# Allegro board BBear_balance_car.brd
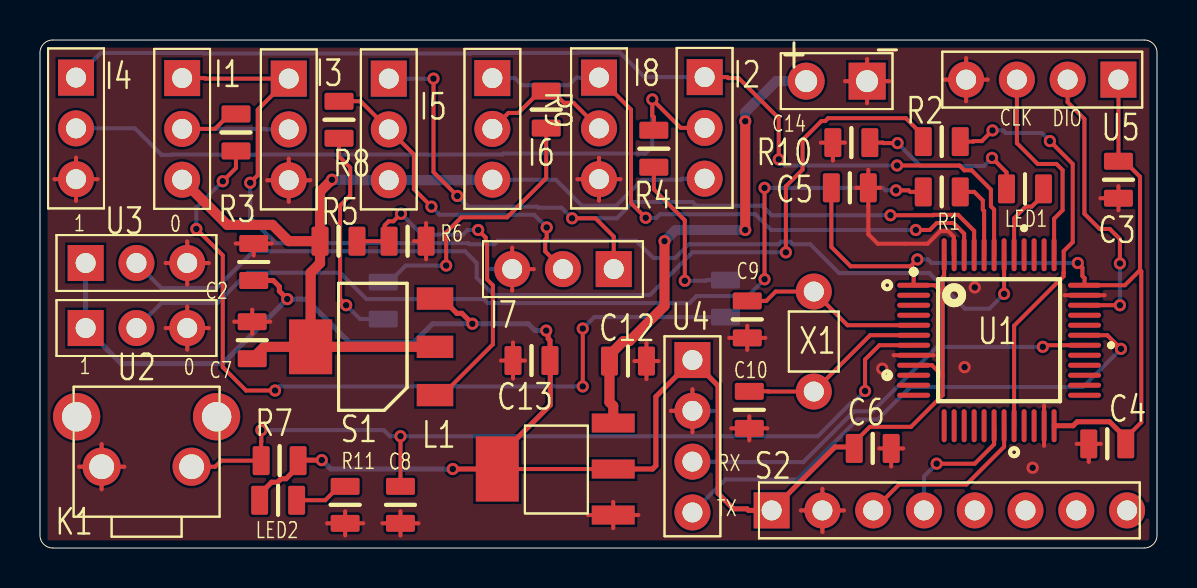
[diagram p0: board, top side]
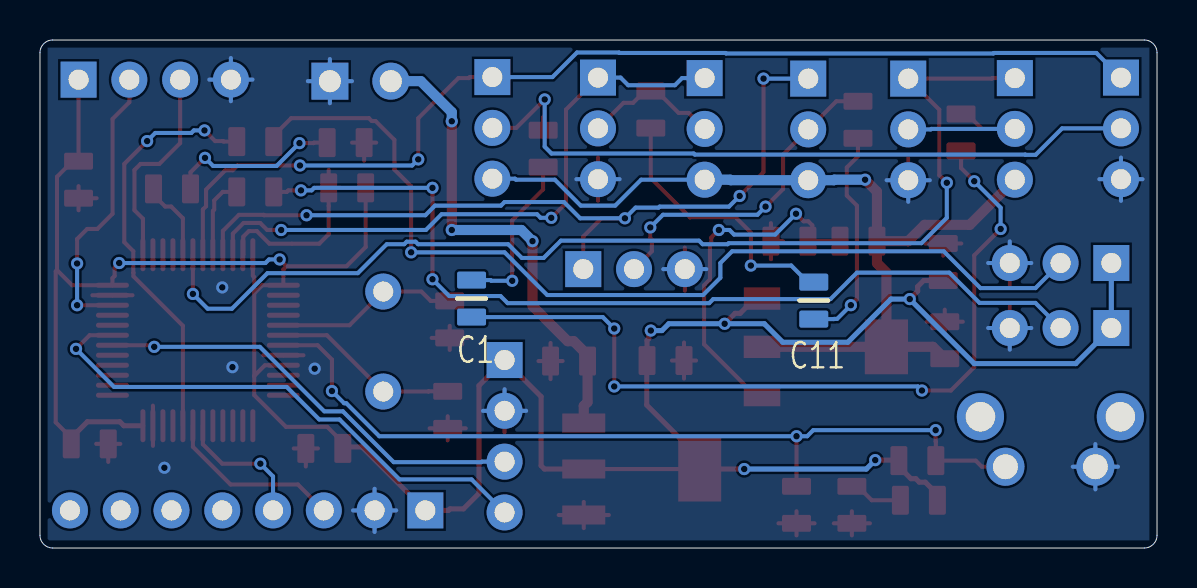
[diagram p1: board, bottom side, seen from below]

Outline 55.88 x 25.4 mm; copper layers: TOP, BOTTOM. Coordinates in mm from the lower left corner of the outline.
Outline path: 0,24.77 arc(0.19,25.21) 0.64,25.4 55.25,25.4 arc(55.69,25.21) 55.88,24.77 55.88,0.63 arc(55.69,0.19) 55.25,0 0.64,0 arc(0.19,0.19) 0,0.63 0,24.77

## Placement (name value [footprint] x y rotation side)
C1  CON2  [C-0805]  34.29 12.47 270 bottom
C2  4.7UF  [C-0805]  10.69 14.3 90 top
C3  0.1UF  [C-0805]  53.95 18.41 90 top
C4  0.1UF  [C-0805]  53.39 5.21 0 top
C5  0.1UF  [C-0805]  40.51 18.01 180 top
C6  0.1UF  [C-0805]  41.66 4.98 180 top
C7  4.7UF  [C-0805]  10.62 10.39 90 top
C8  1UF  [C-0805]  18.03 2.16 90 top
C9  22PF  [C-0805]  35.38 11.43 90 top
C10  22PF  [C-0805]  35.48 6.91 90 top
C11  CON2  [C-0805]  17.17 12.37 270 bottom
C12  0.1UF  [C-0805]  29.41 9.35 0 top
C13  10UF  [C-0805]  24.59 9.37 0 top
C14  POWER  [CON2_R2_54]  41.38 23.34 270 top
I1  IRF4905  [CON3]  7.11 23.49 0 top
I2  IRF4905  [CON3]  33.25 23.55 0 top
I3  IRF3205  [CON3]  12.45 23.47 0 top
I4  IRF3205  [CON3]  1.8 23.52 0 top
I5  IRF4905  [CON3]  17.45 23.47 0 top
I6  IRF4905  [CON3]  22.63 23.49 0 top
I7  IRF3205  [CON3]  28.7 13.94 270 top
I8  IRF3205  [CON3]  27.97 23.52 0 top
K1  KEY-4  [BUTTON_6X6X5]  5.33 4.06 0 top
L1  LM1117  [LM1117_3_3]  28.68 6.25 180 top
LED1  HEARTLED  [C-0805]  49.28 17.96 0 top
LED2  POWER  [C-0805]  11.91 2.39 180 top
R1  10K  [C-0805]  45.11 17.81 0 top
R2  10K  [C-0805]  45.11 20.32 0 top
R3  51R  [C-0805]  9.8 20.78 270 top
R4  51R  [C-0805]  30.71 19.96 270 top
R5  10K  [C-0805]  14.94 15.34 0 top
R6  15K  [C-0805]  18.39 15.34 0 top
R7  10K  [C-0805]  11.99 4.37 180 top
R8  51R  [C-0805]  14.96 21.41 270 top
R9  51R  [C-0805]  25.32 21.92 270 top
R10  1K  [C-0805]  40.59 20.27 180 top
R11  1K  [C-0805]  15.27 2.16 270 top
S1  SPX1117  [SOT223]  16.71 10.06 90 top
S2  MPU6050  [CON8]  36.6 1.88 90 top
U1  STM32F103C8T6  [NCU100_LQFP_48]  47.98 10.39 0 top
U2  BOOT0  [CON3]  2.29 11 90 top
U3  BOOT1  [CON3]  2.29 14.25 90 top
U4  -  [CON4]  32.64 9.4 0 top
U5  SWD  [CON4]  53.95 23.42 270 top
X1  -  [XTAL]  38.71 7.82 90 top

## Library data of the parts
C1 C11 = CON2: Tolerance: RichardLC; User Part Number: pn
C2-C10 C12 C13 = CAP: Tolerance: RichardLC; User Part Number: pn
C14 = CON2
I1 I2 I5 I6 = IRF4905
I3 I4 I7 I8 = IRL3205
K1 = KEY-4
L1 = LM1117
LED1 LED2 = LED: Tolerance: RichardLC; User Part Number: pn
R1-R11 = R: Tolerance: RichardLC; User Part Number: pn
S1 = SPX1117_5
S2 = CON8
U1 = STM32F103C8T6: User Part Number: pn; Tolerance: RichardLC
U2 U3 = CON3
U4 U5 = CON4
X1 = XTAL

## Footprints (pads in the part's own frame, mm; a bottom-side part is the same pattern mirrored in y, then rotated)
BUTTON_6X6X5
  round 1.905 hole 1.245: 1(-2.25,0) 2(2.25,0)
  round 2.362 hole 1.473: 3(-3.5,2.5) 4(3.5,2.5)
C-0805
  custom 0.848x1.448 smd: 1(-0.925,0) 2(0.925,0)
CON2_R2_54
  rect 1.849x1.849 hole 1.1: 1(0,0)
  round 1.849 hole 1.1: 2(0,-3.048)
CON3
  rect 1.8x1.8 hole 1: 1(0,0)
  round 1.8 hole 1: 2(0,-2.54) 3(0,-5.08)
CON4
  rect 1.8x1.8 hole 1: 1(0,0)
  round 1.8 hole 1: 2(0,-2.54) 3(0,-5.08) 4(0,-7.62)
CON8
  rect 1.8x1.8 hole 1: 1(0,0)
  round 1.8 hole 1: 2(0,-2.54) 3(0,-5.08) 4(0,-7.62) 5(0,-10.16) 6(0,-12.7) 7(0,-15.24) 8(0,-17.78)
LM1117_3_3
  rect 2.15x0.95 smd: 1(0,0) 2(0,2.3) 3(0,4.6)
  rect 2.15x3.25 smd: 4(5.8,2.3)
NCU100_LQFP_48
  oval 1.651x0.249 smd: 1(-4.275,2.75) 2(-4.275,2.25) 3(-4.275,1.75) 4(-4.275,1.25) 5(-4.275,0.75) 6(-4.275,0.25) 7(-4.275,-0.25) 8(-4.275,-0.75) 9(-4.275,-1.25) 10(-4.275,-1.75) 11(-4.275,-2.25) 12(-4.275,-2.75) 25(4.275,-2.75) 26(4.275,-2.25) 27(4.275,-1.75) 28(4.275,-1.25) 29(4.275,-0.75) 30(4.275,-0.25) 31(4.275,0.25) 32(4.275,0.75) 33(4.275,1.25) 34(4.275,1.75) 35(4.275,2.25) 36(4.275,2.75)
  oval 0.249x1.651 smd: 13(-2.75,-4.275) 14(-2.25,-4.275) 15(-1.75,-4.275) 16(-1.25,-4.275) 17(-0.75,-4.275) 18(-0.25,-4.275) 19(0.25,-4.275) 20(0.75,-4.275) 21(1.25,-4.275) 22(1.75,-4.275) 23(2.25,-4.275) 24(2.75,-4.275) 37(2.75,4.275) 38(2.25,4.275) 39(1.75,4.275) 40(1.25,4.275) 41(0.75,4.275) 42(0.25,4.275) 43(-0.25,4.275) 44(-0.75,4.275) 45(-1.25,4.275) 46(-1.75,4.275) 47(-2.25,4.275) 48(-2.75,4.275)
SOT223
  rect 1.118x1.829 smd: 1(-2.413,-3.048) 2(0,-3.048) 3(2.413,-3.048)
  rect 2.743x2.159 smd: 4(0,3.175)
XTAL
  round 1.8 hole 1: 1(0,0) 2(5,0)

## Nets
GND: C2.2 C3.1 C4.1 C5.1 C6.1 C7.2 C8.1 C9.1 C10.1 C12.2 C13.1 C14.1(-) I3.3(S) I4.3(S) I7.3(S) I8.3(S) K1.1 L1.3(GND) R6.2 R10.2 R11.2 S2.2 U1.8(VSSA) U1.23(VSS_1) U1.35(VSS_2) U1.47(VSS_3) U2.3 U3.3 U4.2 U5.4
VCC3.3: C2.1 C3.2 C4.2 C5.2 C6.2 C13.2 L1.2(OUT2) L1.4(OUT1) LED2.2 R7.1 S1.3(VIN) S2.1 U1.1(VBAT) U1.9(VDDA) U1.24(VDD_1) U1.36(VDD_2) U1.48(VDD_3) U2.1 U3.1 U4.1 U5.1
BAT_5V: C7.1 I1.3(S) I2.3(S) I5.3(S) I6.3(S) R5.1 S1.2(VOUT) S1.4(VO)
BOOT0: R1.2 U1.44(BOOT0)
BOOT1: R2.2 U1.20(PB2/BOOT1)
HEART_LED: LED1.2 U1.41(PB5)
LEFT_BACK: I2.1(G) I4.1(G) U1.43(PB7)
LEFT_FOR: I1.1(G) I3.1(G) U1.42(PB6)
ML+: C1.2(+) R3.2
ML-: C1.1(-) R4.2
MR+: C11.2(+) R8.2
MR-: C11.1(-) R9.2
OSCIN: C9.2 U1.5(OSCIN) X1.2
OSCOUT: C10.2 U1.6(OSCOUT) X1.1
PA9: U1.31(PA10) U4.4
PA10: U1.30(PA9) U4.3
RESET: C8.2 K1.2 R7.2 U1.7(NRST)
RIGHT_BACK: I6.1(G) I8.1(G) U1.46(PB9)
RIGHT_FOR: I5.1(G) I7.1(G) U1.45(PB8)
SCL: S2.3 U1.19(PB1)
SDA: S2.4 U1.18(PB0)
SWCLK: U1.37(SWCLK) U5.3
SWIO: U1.34(SWIO) U5.2
N00802: C12.1 C14.2(+) L1.1(VCC-IN)
N03806: LED2.1 R11.1
N05288: I1.2(D) I3.2(D) R3.1
N05461: I2.2(D) I4.2(D) R4.1
N06847: I5.2(D) I7.2(D) R8.1
N06871: I6.2(D) I8.2(D) R9.1
N07785: LED1.1 R10.1
N16026: R5.2 R6.1 S1.1(ADJ)
N073361: R1.1 U2.2
N073541: R2.1 U3.2

Pads without a net: K1 3 4; S2 5 6 7 8; U1 2 3 4 10 11 12 13 14 15 16 17 21 22 25 26 27 28 29 32 33 38 39 40

## Via types
v1: diameter 0.61, hole 0.33, TOP to BOTTOM, 54 vias

## Routing (per net, layer and track width the routed paths; a pad name or vN(x,y) marks a point on that pad's centre or on a via; arc(x,y) is an arc through that point)
GND: length 139.1
  TOP w0.203: 23.66,8.47 C13.1 ; C13.1 23.66,10.27 ; C13.1 24.26,9.37 ; C13.1 23.06,9.37 ; 39.06,20.27 R10.2 ; R10.2 40.27,20.27 ; R10.2 39.66,19.37 ; 12.45,17.31 I3.3 ; I3.3 11.37,18.39 ; I3.3 13.52,18.39 ; I3.3 12.45,19.47 ; C12.2 30.34,10.25 ; C12.2 29.74,9.35 ; C12.2 30.34,8.44 ; C12.2 30.94,9.35 ; U2.3 7.37,12.08 ; U2.3 8.44,11 ; U2.3 7.37,9.92 ; U2.3 6.29,11 ; C14.1 41.38,24.45 ; C14.1 41.38,22.24 ; C14.1 42.48,23.34 ; C14.1 40.27,23.34 ; 50.23,5.11 U1.23 50.23,7.12 ; C8.1 18.03,1.84 ; C8.1 17.13,1.23 ; C8.1 18.94,1.23 ; C8.1 18.03,0.63 ; C5.1 41.44,15.69 41.91,15.21 44.4,15.21 45.03,15.84 45.43,15.84 45.71,15.56 45.71,14.68 U1.47 ; C5.1 42.04,18.01 ; C5.1 40.84,18.01 ; C5.1 41.44,18.91 ; C2.2 11.6,15.23 ; C2.2 9.79,15.23 ; C2.2 10.69,14.62 ; C10.1 35.48,6.59 ; C10.1 34.58,5.98 ; C10.1 36.39,5.98 ; C10.1 35.48,5.38 ; 1.8,17.36 I4.3 ; I4.3 2.88,18.44 ; I4.3 1.8,19.52 ; I4.3 0.72,18.44 ; 39.14,0.8 S2.2 ; S2.2 38.06,1.88 ; S2.2 40.22,1.88 ; S2.2 39.14,2.96 ; 18.71,15.34 R6.2 ; R6.2 19.31,14.44 ; R6.2 19.31,16.24 ; U3.3 7.37,15.33 ; U3.3 6.29,14.25 ; U3.3 7.37,13.17 ; U3.3 8.44,14.25 ; 1.95,4.06 K1.1 ; K1.1 3.08,5.19 ; K1.1 4.21,4.06 ; K1.1 3.08,2.93 ; 14.36,1.23 R11.2 ; R11.2 15.27,0.63 ; R11.2 15.27,1.84 ; R11.2 16.17,1.23 ; 45.25,23.42 U5.4 ; U5.4 46.33,24.5 ; U5.4 47.41,23.42 ; U5.4 46.33,22.34 ; C3.1 53.95,18.09 ; C3.1 53.05,17.49 ; C3.1 53.95,16.89 ; 53.26,12.64 U1.35 51.25,12.64 ; 26.89,18.44 I8.3 ; I8.3 27.97,17.36 ; I8.3 27.97,19.52 ; I8.3 29.04,18.44 ; 32.64,5.78 U4.2 ; U4.2 31.56,6.86 ; U4.2 32.64,7.94 ; 42.58,4.08 C6.1 ; C6.1 41.98,4.98 ; C6.1 43.18,4.98 ; 27.42,1.65 L1.3 ; L1.3 28.68,2.3 ; L1.3 28.68,1 ; L1.3 29.93,1.65 ; C7.2 11.52,11.31 ; C7.2 10.62,11.92 ; C7.2 9.71,11.31 ; C7.2 10.62,10.71 ; I7.3 23.62,15.02 ; I7.3 23.62,12.87 ; I7.3 24.7,13.94 ; 51.86,5.21 C4.1 ; C4.1 52.47,4.3 ; C4.1 53.07,5.21 ; C9.1 36.28,10.5 ; C9.1 35.38,9.9 ; C9.1 35.38,11.11 ; C9.1 34.48,10.5 ; 44.71,9.64 U1.8 42.7,9.64
  BOTTOM w0.203: 46.33,22.34 U5.4 ; U5.4 46.33,24.5 ; U5.4 47.41,23.42 ; U5.4 45.25,23.42 ; 1.8,17.36 I4.3 ; I4.3 0.72,18.44 ; I4.3 1.8,19.52 ; I4.3 2.88,18.44 ; 38.06,1.88 S2.2 ; S2.2 39.14,0.8 ; S2.2 40.22,1.88 ; S2.2 39.14,2.96 ; U4.2 32.64,7.94 ; U4.2 31.56,6.86 ; U4.2 33.72,6.86 ; 6.29,14.25 U3.3 ; U3.3 7.37,15.33 ; U3.3 8.44,14.25 ; K1.1 3.08,5.19 ; K1.1 4.21,4.06 ; K1.1 1.95,4.06 ; K1.1 3.08,2.93 ; I3.3 13.52,18.39 ; I3.3 11.37,18.39 ; I3.3 12.45,17.31 ; 24.7,13.94 I7.3 22.54,13.94 ; 29.04,18.44 I8.3 26.89,18.44 ; C14.1 42.48,23.34 ; C14.1 41.38,24.45 ; C14.1 40.27,23.34 ; C14.1 41.38,22.24 ; 7.37,9.92 U2.3 ; U2.3 8.44,11 ; U2.3 6.29,11
  vias: v1(42.14,8.97) v1(46.25,9.04) v1(46.76,13.03) v1(49.66,4.01)
VCC3.3: length 146
  TOP w0.203: 54.32,5.51 55.09,6.28 55.09,13.83 55.03,13.89 ; 45.16,12.74 45.16,13.54 45.23,13.61 U1.48 ; 45.16,12.74 44.76,13.14 U1.1 43.71,13.93 43.55,14.08 ; 45.16,12.74 45.16,8.6 ; 43.55,14.08 v1(43.89,14.43) ; 43.55,14.08 40.55,14.08 39.59,15.05 C5.2 ; U1.9 44.63,9.14 45.16,8.6 ; C6.2 40.73,5.28 41.51,6.06 43.57,6.06 45.16,7.65 45.16,8.6 ; 55.03,13.89 54.27,13.14 U1.36 52.26,13.49 52.15,13.6 52.15,14.02 v1(51.92,14.25) ; 55.03,13.89 55.03,18.56 54.25,19.34 C3.2 U5.1 ; U1.24 50.74,6.11 ; L1.4 L1.2
  TOP w0.254: C2.1 11.67,13.38 11.97,13.07 11.97,12.84 v1(12.37,12.45) ; C6.2 40.65,5.05 39.78,5.05 S2.1 35.45,1.88 35.37,1.96 34.7,1.96 33.92,2.73 33.92,8.12 U4.1 30.81,7.57 30.81,4.11 30.64,3.95 L1.2 ; S1.3 20.12,12.47 20.86,11.73 21.11,11.73 v1(21.63,11.21) ; v1(25.32,10.87) 25.43,10.77 25.43,10.46 25.51,10.38 C13.2 25.53,9.36 25.53,7.15 22.88,4.5 L1.4 v1(20.65,3.95) ; v1(14.1,4.39) 12.94,4.39 R7.1 12.91,4.07 12.31,3.47 12.07,3.47 11.89,3.29 11.59,3.29 10.99,2.69 LED2.2 ; C4.2 54.32,5.51 53.51,6.31 51.88,6.31 51.69,6.11 50.74,6.11
  BOTTOM w0.203: v1(43.89,14.43) 44.42,14.43 44.6,14.25 v1(51.92,14.25)
  BOTTOM w0.254: v1(14.1,4.39) 14.54,3.95 v1(20.65,3.95) ; U3.1 U2.1 4.06,9.22 9.14,9.22 v1(12.37,12.45) 13.31,12.45 15.47,10.29 18.72,10.29 19.64,11.21 v1(21.63,11.21) 24.42,11.21 24.77,10.87 v1(25.32,10.87)
BAT_5V: length 46.1
  TOP w0.508: R5.1 12.44,15.34 11.63,16.16 9.37,16.16 I1.3 ; R5.1 14.01,17.82 v1(14.61,18.41) ; R5.1 14.01,14.24 13.54,13.76 S1.4 ; S1.4 11.21,10.06 C7.1 ; S1.4 S1.2
  BOTTOM w0.203: I2.3 32.12,18.47 32.07,18.41 30.12,18.41 28.83,17.12 27.1,17.12 25.81,18.41 I6.3
  BOTTOM w0.508: v1(14.61,18.41) 16.14,18.41 16.17,18.39 I5.3 21.32,18.39 21.35,18.41 I6.3
BOOT0: length 4
  TOP w0.203: R1.2 46.74,17.81 47.16,17.38 47.16,16.92 47.23,16.85 U1.44
BOOT1: length 20.9
  TOP w0.203: v1(47.65,20.88) 47.12,20.35 46.71,20.35 46.69,20.32 R2.2 ; U1.20 48.73,11.11 51.21,13.59 51.21,13.76 51.21,13.76 51.21,14.84 51.66,15.29 51.66,19.2 v1(50.52,20.35)
  BOTTOM w0.203: v1(47.65,20.88) 48.18,20.88 48.31,20.75 50.11,20.75 v1(50.52,20.35)
HEART_LED: length 4.1
  TOP w0.203: LED1.2 50.2,17.66 49.62,17.07 49.32,17.07 48.73,16.49 U1.41
LEFT_BACK: length 53.7
  TOP w0.203: I2.1 34.38,23.55 34.43,23.49 34.95,23.49 36.96,21.49 v1(36.96,19.43) ; U1.43 47.73,16.93 47.57,17.09 47.57,17.92 46.61,18.88 46.24,18.88 46,19.13 v1(42.88,19.13)
  BOTTOM w0.203: I2.1 30.24,23.55 29.01,24.78 26.92,24.78 26.89,24.75 21.58,24.75 21.56,24.73 8.18,24.73 8.16,24.75 3.03,24.75 I4.1 ; v1(42.88,19.13) 37.26,19.13 v1(36.96,19.43)
LEFT_FOR: length 55.8
  TOP w0.203: v1(10.52,18.26) 10.89,18.64 10.89,21.92 I3.1 8.27,23.47 8.24,23.49 I1.1 ; U1.42 v1(48.23,12.7)
  BOTTOM w0.203: v1(48.23,12.7) 47.49,11.96 46.28,11.96 44.5,13.74 39.98,13.74 38.53,15.19 37.66,15.19 37.53,15.32 37.09,15.32 36.96,15.19 32.46,15.19 31.78,14.5 30.68,14.5 29.82,15.37 22.91,15.37 22.73,15.19 21.48,15.19 21.43,15.24 11.79,15.24 10.52,16.51 v1(10.52,18.26)
ML+: length 41
  TOP w0.203: v1(27.15,10.97) v1(27.15,8.08) ; v1(11.76,7.87) 10.31,7.87 9.14,9.04 9.14,14.63 v1(7.82,15.95) ; R3.2 9.8,19 v1(9.14,18.34)
  BOTTOM w0.203: v1(27.15,8.08) 11.96,8.08 v1(11.76,7.87) ; v1(9.14,18.34) 7.82,17.02 v1(7.82,15.95) ; v1(27.15,10.97) 27.73,11.55 C1.2
ML-: length 8.4
  TOP w0.203: v1(32.26,13.36) 32.26,16.38 30.71,17.93 R4.2
  BOTTOM w0.203: C1.1 33.34,13.4 33.3,13.36 v1(32.26,13.36)
MR+: length 11.1
  TOP w0.203: R8.2 14.96,19.58 15.52,19.02 15.52,17.63 15.01,17.12 15.01,12.45 v1(15.32,12.14)
  BOTTOM w0.203: v1(15.32,12.14) 16,11.46 16.15,11.46 16.17,11.44 C11.2
MR-: length 13.8
  TOP w0.203: v1(20.32,14.12) 20.32,15.77 21.08,16.54 23.37,16.54 25.32,18.49 R9.2
  BOTTOM w0.203: v1(20.32,14.12) 18.3,14.12 17.47,13.29 C11.1
OSCIN: length 9.2
  TOP w0.203: U1.5 40.39,11.14 X1.2 36.8,12.82 36.33,12.36 C9.2
OSCOUT: length 9.4
  TOP w0.203: C10.2 36.44,7.83 36.45,7.82 X1.1 41.52,10.64 U1.6
PA9: length 26.9
  TOP w0.203: U1.31 53.39,10.64 v1(54.08,9.96)
  BOTTOM w0.203: U4.4 34.29,3.43 37.9,3.43 40.89,6.43 41.91,6.43 43.54,8.05 52.17,8.05 v1(54.08,9.96)
PA10: length 22
  TOP w0.203: U1.30 50.25,10.14 v1(50.17,10.06)
  BOTTOM w0.203: U4.3 33.77,4.32 33.79,4.29 38.19,4.29 40.73,6.83 41.66,6.83 44.88,10.06 v1(50.17,10.06)
RESET: length 43.2
  TOP w0.203: v1(18.03,5.59) C8.2 ; v1(11.07,5.89) 11.07,5.33 11.06,5.32 R7.2 9.07,4.37 8.77,4.06 K1.2 ; v1(41.28,7.85) 41.28,9.42 41.99,10.14 U1.7
  BOTTOM w0.203: v1(11.07,5.89) 17.2,5.89 17.5,5.59 v1(18.03,5.59) 38.91,5.59 40.56,7.24 40.67,7.24 v1(41.28,7.85)
RIGHT_BACK: length 31.4
  TOP w0.203: v1(43.81,15.9) 44.51,15.9 44.86,16.25 45.7,16.25 46.23,15.72 U1.46 ; v1(30.3,16.51) 29.57,17.25 29.57,21.92 I8.1
  BOTTOM w0.203: v1(30.3,16.51) 30.84,16.51 31.01,16.69 35.79,16.69 36.58,15.9 v1(43.81,15.9) ; I8.1 26.84,23.52 26.46,23.14 24.12,23.14 23.76,23.49 I6.1
RIGHT_FOR: length 41.1
  TOP w0.203: v1(26.62,16.48) 27.79,16.48 28.7,15.57 I7.1 ; v1(19.69,23.47) 19.69,18.8 v1(20.88,17.6) ; U1.45 46.73,15.85 45.93,16.66 44.69,16.66 44.67,16.64 v1(42.55,16.64)
  BOTTOM w0.203: v1(42.55,16.64) 36.6,16.64 36.12,17.12 32.82,17.12 32.64,17.3 29.67,17.3 28.85,16.48 v1(26.62,16.48) 26.09,17.02 24.93,17.02 24.88,17.07 21.41,17.07 v1(20.88,17.6) ; v1(19.69,23.47) I5.1
SCL: length 8.9
  TOP w0.203: S2.3 42.98,3.17 46.35,3.17 48.23,5.06 U1.19
SDA: length 6.8
  TOP w0.203: v1(44.86,4.22) 46.76,4.22 47.73,5.19 U1.18
  BOTTOM w0.203: S2.4 44.22,3.58 v1(44.86,4.22)
SWCLK: length 10.4
  TOP w0.203: U5.3 48.87,20.24 49.91,19.2 50.85,19.2 51.16,18.9 51.16,16.89 50.73,16.47 U1.37
SWIO: length 14.4
  TOP w0.203: v1(54.02,14.23) 54.02,15.45 53.52,15.95 53.01,15.95 52.25,16.71 52.25,21.45 51.41,22.29 U5.2 ; U1.34 v1(54.02,12.14)
  BOTTOM w0.203: v1(54.02,12.14) v1(54.02,14.23)
N00802: length 24.3
  TOP w0.508: v1(35.28,21.34) v1(35.28,15.9) ; L1.1 28.68,7.1 28.49,7.29 C12.1 28.49,9.65 29.18,10.34 29.48,10.34 31.24,12.1 v1(31.24,15.34)
  BOTTOM w0.508: v1(31.24,15.34) 31.8,15.9 v1(35.28,15.9) ; C14.2 36.83,23.34 35.28,21.79 v1(35.28,21.34)
N03806: length 2.7
  TOP w0.203: LED2.1 14.27,2.39 14.97,3.08 R11.1
N05288: length 8.3
  TOP w0.203: R3.1 9.5,21.7 8.76,20.95 7.11,20.95
  BOTTOM w0.203: 7.11,20.95 11.29,20.95 11.32,20.93 I3.2
N05461: length 36.7
  TOP w0.203: I2.2 32.05,21.01 v1(30.63,22.43) 30.63,21.62 30.71,21.54 R4.1
  BOTTOM w0.203: I4.2 4.75,20.98 6.07,19.66 6.58,19.66 6.59,19.67 23.12,19.67 23.18,19.72 30.29,19.72 30.63,20.07 v1(30.63,22.43)
N06847: length 16.5
  TOP w0.203: v1(25.35,16.03) 25.35,15.49 25.27,15.42 25.27,14.83 I7.2 ; v1(19.58,17.07) 18.71,17.95 18.71,19.67 I5.2 16.04,22.34 R8.1
  BOTTOM w0.203: v1(25.35,16.03) 24.71,16.66 19.99,16.66 v1(19.58,17.07)
N06871: length 6.9
  TOP w0.203: 22.63,20.95 23.43,21.75 23.93,21.75 25.02,22.85 R9.1 25.62,22.85 26.21,22.26 26.69,22.26 I8.2
N07785: length 8.6
  TOP w0.203: v1(47.62,19.51) 48.35,18.78 LED1.1 ; R10.1 42.17,20.27 42.19,20.24 v1(42.9,20.24)
  BOTTOM w0.203: v1(42.9,20.24) 44.04,19.1 47.22,19.1 v1(47.62,19.51)
N16026: length 17.9
  TOP w0.203: R5.2 R6.1 17.24,15.56 17.24,16.13 17.45,16.34 17.68,16.34 v1(18.06,16.71) ; S1.1 20.12,7.65 22.66,10.19 22.66,13.13 22.37,13.42 22.37,15.2 22.3,15.27 22.3,15.52 v1(21.92,15.9)
  BOTTOM w0.203: v1(18.06,16.71) 19.1,15.67 21.16,15.67 21.39,15.9 v1(21.92,15.9)
N073361: length 46.3
  TOP w0.203: v1(36.25,13.44) v1(36.25,18.01) ; v1(42.82,17.88) 43.46,17.88 43.53,17.81 R1.1
  BOTTOM w0.203: v1(36.25,13.44) 35.41,12.6 32.84,12.6 32.49,12.24 22.4,12.24 22.2,12.45 16.33,12.45 15.01,13.77 10.39,13.77 8.88,12.25 6.08,12.25 U2.2 ; v1(36.25,18.01) 42.16,18.01 42.29,17.88 v1(42.82,17.88)
N073541: length 49.1
  TOP w0.203: R2.1 44.19,20.62 43.31,21.49 39.43,21.49 39.28,21.35 39.09,21.35 38.15,20.41 38.15,18.92 37.31,18.08 v1(37.31,14.78)
  BOTTOM w0.203: U3.2 6.08,12.99 8.83,12.99 10.67,14.83 21.26,14.83 21.84,14.25 21.84,13.51 22.71,12.65 30.51,12.65 32.64,14.78 v1(37.31,14.78)

## Copper pours and planes (outline as drawn; the poured copper is in the pictures)
GND on TOP: 0.38,0.38 0.38,25.02 55.5,25.02 55.5,0.46 55.42,0.38 ; 2 cut-outs
GND on BOTTOM: 0.38,0.38 0.38,25.02 55.5,25.02 55.5,0.46 55.42,0.38 ; 12 cut-outs

## Text on the board
Ref Des/Silkscreen Top: 1 | 0 | TX | RX | CLK | DIO | + | -
COMPVAL_TYPE_TOP: FIGURE | SIZE | 13.0 | 39.37 | 43.3 | 49.0 | 58.0 | DRILL CHART: TOP to BOTTOM | ALL UNITS ARE IN MILS | PLATED | QTY | 54 | 48 | 2
